# Altium PCB AVR精简学习板.PcbDoc (part 6 of 10)
Units mm, origin at the board's own origin, x right, y up, seen from the top; angles counter-clockwise.
Board outline 152.4 x 101.6 mm, 2 copper layers (Top Layer, Bottom Layer); 44 components, 51 nets, 211 pads, 6 vias.
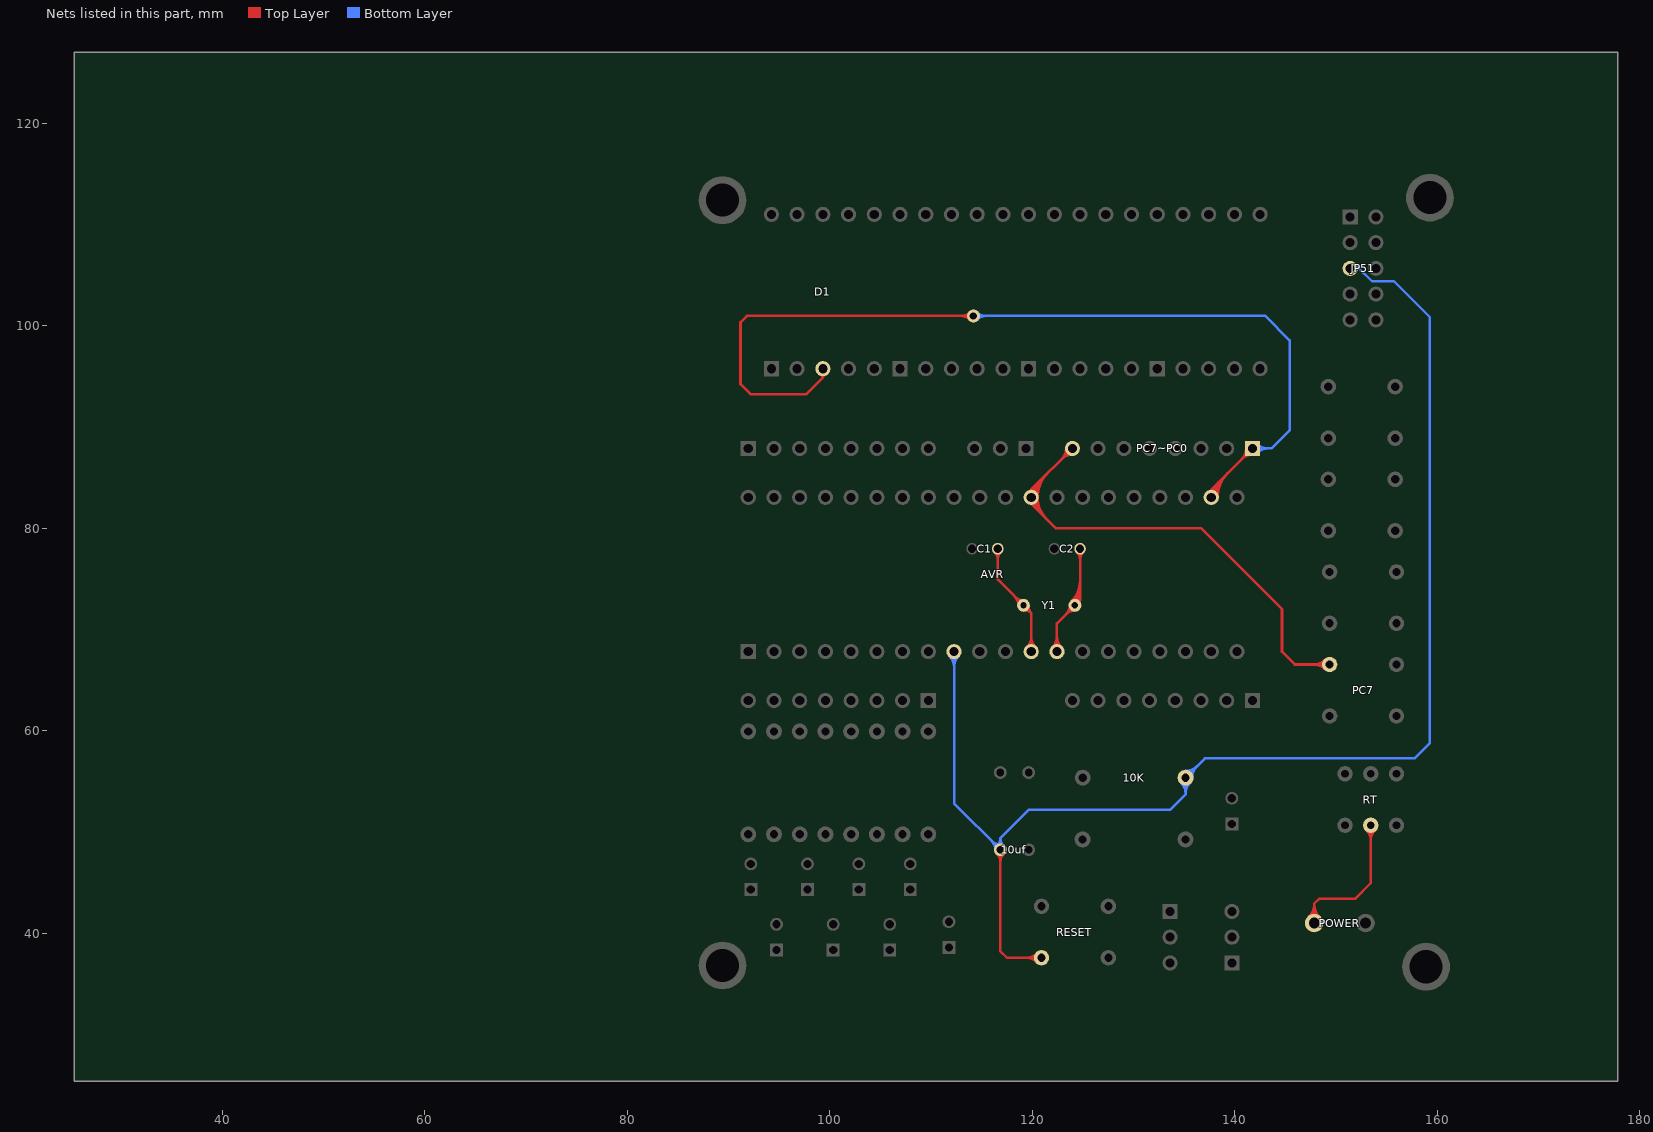
[diagram p6: the nets of this part, all layers, seen from the top]

## Via types
v1: diameter 1.27, hole 0.711, Top Layer to Bottom Layer, 6 vias

## Nets (pads, with @x,y where several pads share a name; then routed paths per layer and width w, separated by ;. In a path a pad name is that pad's centre, name@x,y a point inside that pad or via, vN(x,y) a via of type N, cw(c..) or ccw(c..) an arc to the next point about the centre after c; other vN are vias at no path point) (continued)
Net4_0: AVR.29 PC7.0 PC7~PC0.8 | length 201.8
  Top Layer w0.254: PC7~PC0.8@123.952,87.884 119.888,83.82 ; PC7.0@149.352,66.548 145.923,66.548 144.653,67.818 144.653,72.009 136.652,80.01 122.301,80.01 119.888,82.423 119.888,83.82 ; AVR.29@119.749,83.058 ccw(c120.946,83.058) 120.1,82.211 ; AVR.29@119.749,83.058 cw(c121.253,83.058) 120.19,84.122 ; AVR.29@119.749,83.058 ccw(c120.946,83.058) 120.1,82.211 ; AVR.29@119.749,83.058 cw(c121.253,83.058) 120.19,84.122 ; AVR.29@119.749,83.058 cw(c121.253,83.058) 120.19,84.122 ; AVR.29@119.749,83.058 ccw(c120.946,83.058) 120.1,82.211 ; AVR.29@119.749,83.058 cw(c121.253,83.058) 120.19,84.122 ; AVR.29@119.749,83.058 ccw(c120.946,83.058) 120.1,82.211 ; AVR.29@119.749,83.058 cw(c121.253,83.058) 120.19,84.122 ; AVR.29@119.749,83.058 ccw(c120.946,83.058) 120.1,82.211 ; AVR.29@119.749,83.058 cw(c121.253,83.058) 120.19,84.122 ; AVR.29@119.749,83.058 ccw(c120.946,83.058) 120.1,82.211 ; AVR.29@119.749,83.058 cw(c121.253,83.058) 120.19,84.122 ; AVR.29@119.749,83.058 ccw(c120.946,83.058) 120.1,82.211 ; AVR.29@119.764,83.669 ccw(c119.734,83.82) 119.888,83.82 ; AVR.29@119.764,83.669 ccw(c119.734,83.82) 119.888,83.82 ; AVR.29@119.764,83.669 ccw(c119.734,83.82) 119.888,83.82 ; AVR.29@119.764,83.669 ccw(c119.734,83.82) 119.888,83.82 ; AVR.29@119.764,83.669 ccw(c119.734,83.82) 119.888,83.82 ; AVR.29@119.764,83.669 ccw(c119.734,83.82) 119.888,83.82 ; AVR.29@119.764,83.669 ccw(c119.734,83.82) 119.888,83.82 ; 119.888,83.82 ccw(c120.042,83.82) AVR.29@120.012,83.669 ; 119.888,83.82 ccw(c120.042,83.82) AVR.29@120.012,83.669 ; 119.888,83.82 ccw(c120.042,83.82) AVR.29@120.012,83.669 ; 119.888,83.82 ccw(c120.042,83.82) AVR.29@120.012,83.669 ; 119.888,83.82 ccw(c120.042,83.82) AVR.29@120.012,83.669 ; 119.888,83.82 ccw(c120.042,83.82) AVR.29@120.012,83.669 ; 119.888,83.82 ccw(c120.042,83.82) AVR.29@120.012,83.669 ; AVR.29@120.003,83.058 ccw(c121.814,83.058) 120.533,81.778 ; AVR.29@120.003,83.058 cw(c122.12,83.058) 120.623,84.555 ; AVR.29@120.003,83.058 ccw(c121.814,83.058) 120.533,81.778 ; AVR.29@120.003,83.058 cw(c122.12,83.058) 120.623,84.555 ; AVR.29@120.003,83.058 cw(c122.12,83.058) 120.623,84.555 ; AVR.29@120.003,83.058 ccw(c121.814,83.058) 120.533,81.778 ; AVR.29@120.003,83.058 cw(c122.12,83.058) 120.623,84.555 ; AVR.29@120.003,83.058 ccw(c121.814,83.058) 120.533,81.778 ; AVR.29@120.003,83.058 cw(c122.12,83.058) 120.623,84.555 ; AVR.29@120.003,83.058 ccw(c121.814,83.058) 120.533,81.778 ; AVR.29@120.003,83.058 cw(c122.12,83.058) 120.623,84.555 ; AVR.29@120.003,83.058 ccw(c121.814,83.058) 120.533,81.778 ; AVR.29@120.003,83.058 cw(c122.12,83.058) 120.623,84.555 ; AVR.29@120.003,83.058 ccw(c121.814,83.058) 120.533,81.778 ; AVR.29@120.257,83.058 ccw(c122.681,83.058) 120.967,81.344 ; AVR.29@120.257,83.058 cw(c122.987,83.058) 121.057,84.989 ; AVR.29@120.257,83.058 ccw(c122.681,83.058) 120.967,81.344 ; AVR.29@120.257,83.058 cw(c122.987,83.058) 121.057,84.989 ; AVR.29@120.257,83.058 cw(c122.987,83.058) 121.057,84.989 ; AVR.29@120.257,83.058 ccw(c122.681,83.058) 120.967,81.344 ; AVR.29@120.257,83.058 cw(c122.987,83.058) 121.057,84.989 ; AVR.29@120.257,83.058 ccw(c122.681,83.058) 120.967,81.344 ; AVR.29@120.257,83.058 cw(c122.987,83.058) 121.057,84.989 ; AVR.29@120.257,83.058 ccw(c122.681,83.058) 120.967,81.344 ; AVR.29@120.257,83.058 cw(c122.987,83.058) 121.057,84.989 ; AVR.29@120.257,83.058 ccw(c122.681,83.058) 120.967,81.344 ; AVR.29@120.257,83.058 cw(c122.987,83.058) 121.057,84.989 ; AVR.29@120.257,83.058 ccw(c122.681,83.058) 120.967,81.344 ; AVR.29@120.511,83.058 ccw(c123.548,83.058) 121.401,80.91 ; AVR.29@120.511,83.058 cw(c123.855,83.058) 121.49,85.422 ; AVR.29@120.511,83.058 ccw(c123.548,83.058) 121.401,80.91 ; AVR.29@120.511,83.058 cw(c123.855,83.058) 121.49,85.422 ; AVR.29@120.511,83.058 cw(c123.855,83.058) 121.49,85.422 ; AVR.29@120.511,83.058 ccw(c123.548,83.058) 121.401,80.91 ; AVR.29@120.511,83.058 cw(c123.855,83.058) 121.49,85.422 ; AVR.29@120.511,83.058 ccw(c123.548,83.058) 121.401,80.91 ; AVR.29@120.511,83.058 cw(c123.855,83.058) 121.49,85.422 ; AVR.29@120.511,83.058 ccw(c123.548,83.058) 121.401,80.91 ; AVR.29@120.511,83.058 cw(c123.855,83.058) 121.49,85.422 ; AVR.29@120.511,83.058 ccw(c123.548,83.058) 121.401,80.91 ; AVR.29@120.511,83.058 cw(c123.855,83.058) 121.49,85.422 ; AVR.29@120.511,83.058 ccw(c123.548,83.058) 121.401,80.91 ; 122.888,86.82 cw(c123.952,85.757) PC7~PC0.8@123.952,87.261 ; 122.888,86.82 ccw(c121.825,87.884) PC7~PC0.8@123.329,87.884 ; 122.888,86.82 cw(c123.952,85.757) PC7~PC0.8@123.952,87.261 ; 122.888,86.82 ccw(c121.825,87.884) PC7~PC0.8@123.329,87.884 ; 122.888,86.82 ccw(c121.825,87.884) PC7~PC0.8@123.329,87.884 ; 122.888,86.82 cw(c123.952,85.757) PC7~PC0.8@123.952,87.261 ; 122.888,86.82 ccw(c121.825,87.884) PC7~PC0.8@123.329,87.884 ; 122.888,86.82 cw(c123.952,85.757) PC7~PC0.8@123.952,87.261 ; 122.888,86.82 ccw(c121.825,87.884) PC7~PC0.8@123.329,87.884 ; 122.888,86.82 cw(c123.952,85.757) PC7~PC0.8@123.952,87.261 ; 122.888,86.82 ccw(c121.825,87.884) PC7~PC0.8@123.329,87.884 ; 122.888,86.82 cw(c123.952,85.757) PC7~PC0.8@123.952,87.261 ; 122.888,86.82 ccw(c121.825,87.884) PC7~PC0.8@123.329,87.884 ; 122.888,86.82 cw(c123.952,85.757) PC7~PC0.8@123.952,87.261 ; 123.322,87.254 cw(c123.952,86.624) PC7~PC0.8@123.952,87.515 ; 123.322,87.254 ccw(c122.692,87.884) PC7~PC0.8@123.583,87.884 ; 123.322,87.254 cw(c123.952,86.624) PC7~PC0.8@123.952,87.515 ; 123.322,87.254 ccw(c122.692,87.884) PC7~PC0.8@123.583,87.884 ; 123.322,87.254 ccw(c122.692,87.884) PC7~PC0.8@123.583,87.884 ; 123.322,87.254 cw(c123.952,86.624) PC7~PC0.8@123.952,87.515 ; 123.322,87.254 ccw(c122.692,87.884) PC7~PC0.8@123.583,87.884 ; 123.322,87.254 cw(c123.952,86.624) PC7~PC0.8@123.952,87.515 ; 123.322,87.254 ccw(c122.692,87.884) PC7~PC0.8@123.583,87.884 ; 123.322,87.254 cw(c123.952,86.624) PC7~PC0.8@123.952,87.515 ; 123.322,87.254 ccw(c122.692,87.884) PC7~PC0.8@123.583,87.884 ; 123.322,87.254 cw(c123.952,86.624) PC7~PC0.8@123.952,87.515 ; 123.322,87.254 ccw(c122.692,87.884) PC7~PC0.8@123.583,87.884 ; 123.322,87.254 cw(c123.952,86.624) PC7~PC0.8@123.952,87.515 ; 147.819,66.548 cw(c147.819,65.015) PC7.0@148.903,66.099 ; 147.819,66.548 ccw(c147.819,68.081) PC7.0@148.903,66.997 ; 147.819,66.548 cw(c147.819,65.015) PC7.0@148.903,66.099 ; 147.819,66.548 ccw(c147.819,68.081) PC7.0@148.903,66.997 ; 147.819,66.548 ccw(c147.819,68.081) PC7.0@148.903,66.997 ; 147.819,66.548 cw(c147.819,65.015) PC7.0@148.903,66.099 ; 147.819,66.548 ccw(c147.819,68.081) PC7.0@148.903,66.997 ; 147.819,66.548 cw(c147.819,65.015) PC7.0@148.903,66.099 ; 147.819,66.548 ccw(c147.819,68.081) PC7.0@148.903,66.997 ; 147.819,66.548 cw(c147.819,65.015) PC7.0@148.903,66.099 ; 147.819,66.548 ccw(c147.819,68.081) PC7.0@148.903,66.997 ; 147.819,66.548 cw(c147.819,65.015) PC7.0@148.903,66.099 ; 147.819,66.548 ccw(c147.819,68.081) PC7.0@148.903,66.997 ; 147.819,66.548 cw(c147.819,65.015) PC7.0@148.903,66.099 ; 148.432,66.548 cw(c148.432,65.628) PC7.0@149.083,66.279 ; 148.432,66.548 ccw(c148.432,67.468) PC7.0@149.083,66.817 ; 148.432,66.548 cw(c148.432,65.628) PC7.0@149.083,66.279 ; 148.432,66.548 ccw(c148.432,67.468) PC7.0@149.083,66.817 ; 148.432,66.548 ccw(c148.432,67.468) PC7.0@149.083,66.817 ; 148.432,66.548 cw(c148.432,65.628) PC7.0@149.083,66.279 ; 148.432,66.548 ccw(c148.432,67.468) PC7.0@149.083,66.817 ; 148.432,66.548 cw(c148.432,65.628) PC7.0@149.083,66.279 ; 148.432,66.548 ccw(c148.432,67.468) PC7.0@149.083,66.817 ; 148.432,66.548 cw(c148.432,65.628) PC7.0@149.083,66.279 ; 148.432,66.548 ccw(c148.432,67.468) PC7.0@149.083,66.817 ; 148.432,66.548 cw(c148.432,65.628) PC7.0@149.083,66.279 ; 148.432,66.548 ccw(c148.432,67.468) PC7.0@149.083,66.817 ; 148.432,66.548 cw(c148.432,65.628) PC7.0@149.083,66.279
Net5_2: 10K.1 10uf.1@116.84,48.26 AVR.9 JP51.5 RESET.2 | length 290.7
  Top Layer w0.254: 10uf.1@116.84,48.26 116.84,38.227 117.475,37.592 RESET.2@120.904,37.592 ; 10uf.1@116.481,47.901 cw(c115.614,47.034) 116.84,47.034 ; 10uf.1@116.481,47.901 cw(c115.614,47.034) 116.84,47.034 ; 10uf.1@116.481,47.901 cw(c115.614,47.034) 116.84,47.034 ; 10uf.1@116.481,47.901 cw(c115.614,47.034) 116.84,47.034 ; 10uf.1@116.481,47.901 cw(c115.614,47.034) 116.84,47.034 ; 10uf.1@116.481,47.901 cw(c115.614,47.034) 116.84,47.034 ; 10uf.1@116.481,47.901 cw(c115.614,47.034) 116.84,47.034 ; 116.84,47.034 cw(c118.066,47.034) 10uf.1@117.199,47.901 ; 116.84,47.034 cw(c118.066,47.034) 10uf.1@117.199,47.901 ; 116.84,47.034 cw(c118.066,47.034) 10uf.1@117.199,47.901 ; 116.84,47.034 cw(c118.066,47.034) 10uf.1@117.199,47.901 ; 116.84,47.034 cw(c118.066,47.034) 10uf.1@117.199,47.901 ; 116.84,47.034 cw(c118.066,47.034) 10uf.1@117.199,47.901 ; 116.84,47.034 cw(c118.066,47.034) 10uf.1@117.199,47.901 ; 119.371,37.592 cw(c119.371,36.059) RESET.2@120.455,37.143 ; 119.371,37.592 ccw(c119.371,39.125) RESET.2@120.455,38.041 ; 119.371,37.592 cw(c119.371,36.059) RESET.2@120.455,37.143 ; 119.371,37.592 ccw(c119.371,39.125) RESET.2@120.455,38.041 ; 119.371,37.592 ccw(c119.371,39.125) RESET.2@120.455,38.041 ; 119.371,37.592 cw(c119.371,36.059) RESET.2@120.455,37.143 ; 119.371,37.592 ccw(c119.371,39.125) RESET.2@120.455,38.041 ; 119.371,37.592 cw(c119.371,36.059) RESET.2@120.455,37.143 ; 119.371,37.592 ccw(c119.371,39.125) RESET.2@120.455,38.041 ; 119.371,37.592 cw(c119.371,36.059) RESET.2@120.455,37.143 ; 119.371,37.592 ccw(c119.371,39.125) RESET.2@120.455,38.041 ; 119.371,37.592 cw(c119.371,36.059) RESET.2@120.455,37.143 ; 119.371,37.592 ccw(c119.371,39.125) RESET.2@120.455,38.041 ; 119.371,37.592 cw(c119.371,36.059) RESET.2@120.455,37.143 ; 119.984,37.592 cw(c119.984,36.672) RESET.2@120.635,37.323 ; 119.984,37.592 ccw(c119.984,38.512) RESET.2@120.635,37.861 ; 119.984,37.592 cw(c119.984,36.672) RESET.2@120.635,37.323 ; 119.984,37.592 ccw(c119.984,38.512) RESET.2@120.635,37.861 ; 119.984,37.592 ccw(c119.984,38.512) RESET.2@120.635,37.861 ; 119.984,37.592 cw(c119.984,36.672) RESET.2@120.635,37.323 ; 119.984,37.592 ccw(c119.984,38.512) RESET.2@120.635,37.861 ; 119.984,37.592 cw(c119.984,36.672) RESET.2@120.635,37.323 ; 119.984,37.592 ccw(c119.984,38.512) RESET.2@120.635,37.861 ; 119.984,37.592 cw(c119.984,36.672) RESET.2@120.635,37.323 ; 119.984,37.592 ccw(c119.984,38.512) RESET.2@120.635,37.861 ; 119.984,37.592 cw(c119.984,36.672) RESET.2@120.635,37.323 ; 119.984,37.592 ccw(c119.984,38.512) RESET.2@120.635,37.861 ; 119.984,37.592 cw(c119.984,36.672) RESET.2@120.635,37.323
  Bottom Layer w0.254: AVR.9@112.268,67.818 112.268,52.832 10uf.1@116.84,48.26 116.84,49.403 ; JP51.5@151.384,105.664 152.273,105.664 ; AVR.9@111.827,67.377 cw(c110.764,66.314) 112.268,66.314 ; AVR.9@111.827,67.377 cw(c110.764,66.314) 112.268,66.314 ; AVR.9@111.827,67.377 cw(c110.764,66.314) 112.268,66.314 ; AVR.9@111.827,67.377 cw(c110.764,66.314) 112.268,66.314 ; AVR.9@111.827,67.377 cw(c110.764,66.314) 112.268,66.314 ; AVR.9@111.827,67.377 cw(c110.764,66.314) 112.268,66.314 ; AVR.9@111.827,67.377 cw(c110.764,66.314) 112.268,66.314 ; AVR.9@112.007,67.557 cw(c111.377,66.927) 112.268,66.927 ; AVR.9@112.007,67.557 cw(c111.377,66.927) 112.268,66.927 ; AVR.9@112.007,67.557 cw(c111.377,66.927) 112.268,66.927 ; AVR.9@112.007,67.557 cw(c111.377,66.927) 112.268,66.927 ; AVR.9@112.007,67.557 cw(c111.377,66.927) 112.268,66.927 ; AVR.9@112.007,67.557 cw(c111.377,66.927) 112.268,66.927 ; AVR.9@112.007,67.557 cw(c111.377,66.927) 112.268,66.927 ; 112.268,66.314 cw(c113.772,66.314) AVR.9@112.709,67.377 ; 112.268,66.314 cw(c113.772,66.314) AVR.9@112.709,67.377 ; 112.268,66.314 cw(c113.772,66.314) AVR.9@112.709,67.377 ; 112.268,66.314 cw(c113.772,66.314) AVR.9@112.709,67.377 ; 112.268,66.314 cw(c113.772,66.314) AVR.9@112.709,67.377 ; 112.268,66.314 cw(c113.772,66.314) AVR.9@112.709,67.377 ; 112.268,66.314 cw(c113.772,66.314) AVR.9@112.709,67.377 ; 112.268,66.927 cw(c113.159,66.927) AVR.9@112.529,67.557 ; 112.268,66.927 cw(c113.159,66.927) AVR.9@112.529,67.557 ; 112.268,66.927 cw(c113.159,66.927) AVR.9@112.529,67.557 ; 112.268,66.927 cw(c113.159,66.927) AVR.9@112.529,67.557 ; 112.268,66.927 cw(c113.159,66.927) AVR.9@112.529,67.557 ; 112.268,66.927 cw(c113.159,66.927) AVR.9@112.529,67.557 ; 112.268,66.927 cw(c113.159,66.927) AVR.9@112.529,67.557 ; 115.973,49.127 cw(c115.106,48.26) 10uf.1@116.332,48.26 ; 115.973,49.127 ccw(c116.84,49.994) 10uf.1@116.84,48.768 ; 115.973,49.127 cw(c115.106,48.26) 10uf.1@116.332,48.26 ; 115.973,49.127 ccw(c116.84,49.994) 10uf.1@116.84,48.768 ; 115.973,49.127 ccw(c116.84,49.994) 10uf.1@116.84,48.768 ; 115.973,49.127 cw(c115.106,48.26) 10uf.1@116.332,48.26 ; 115.973,49.127 ccw(c116.84,49.994) 10uf.1@116.84,48.768 ; 115.973,49.127 cw(c115.106,48.26) 10uf.1@116.332,48.26 ; 115.973,49.127 ccw(c116.84,49.994) 10uf.1@116.84,48.768 ; 115.973,49.127 cw(c115.106,48.26) 10uf.1@116.332,48.26 ; 115.973,49.127 ccw(c116.84,49.994) 10uf.1@116.84,48.768 ; 115.973,49.127 cw(c115.106,48.26) 10uf.1@116.332,48.26 ; 115.973,49.127 ccw(c116.84,49.994) 10uf.1@116.84,48.768 ; 115.973,49.127 cw(c115.106,48.26) 10uf.1@116.332,48.26 ; 10uf.1@116.5,48.637 ccw(c115.808,49.403) 116.84,49.403 ; 10uf.1@116.5,48.637 ccw(c115.808,49.403) 116.84,49.403 ; 10uf.1@116.5,48.637 ccw(c115.808,49.403) 116.84,49.403 ; 10uf.1@116.5,48.637 ccw(c115.808,49.403) 116.84,49.403 ; 10uf.1@116.5,48.637 ccw(c115.808,49.403) 116.84,49.403 ; 10uf.1@116.5,48.637 ccw(c115.808,49.403) 116.84,49.403 ; 10uf.1@116.5,48.637 ccw(c115.808,49.403) 116.84,49.403 ; 116.84,49.403 ccw(c117.872,49.403) 10uf.1@117.18,48.637 ; 116.84,49.403 ccw(c117.872,49.403) 10uf.1@117.18,48.637 ; 116.84,49.403 ccw(c117.872,49.403) 10uf.1@117.18,48.637 ; 116.84,49.403 ccw(c117.872,49.403) 10uf.1@117.18,48.637 ; 116.84,49.403 ccw(c117.872,49.403) 10uf.1@117.18,48.637 ; 116.84,49.403 ccw(c117.872,49.403) 10uf.1@117.18,48.637 ; 116.84,49.403 ccw(c117.872,49.403) 10uf.1@117.18,48.637 ; 116.84,49.403 119.634,52.197 133.604,52.197 135.132,53.725 10K.1@135.132,55.373 137.036,57.277 157.734,57.277 159.258,58.801 159.258,100.838 155.702,104.394 153.543,104.394 152.273,105.664 ; 10K.1@134.665,54.906 cw(c133.537,53.779) 135.132,53.779 ; 10K.1@134.665,54.906 cw(c133.537,53.779) 135.132,53.779 ; 10K.1@134.665,54.906 cw(c133.537,53.779) 135.132,53.779 ; 10K.1@134.665,54.906 cw(c133.537,53.779) 135.132,53.779 ; 10K.1@134.665,54.906 cw(c133.537,53.779) 135.132,53.779 ; 10K.1@134.665,54.906 cw(c133.537,53.779) 135.132,53.779 ; 10K.1@134.665,54.906 cw(c133.537,53.779) 135.132,53.779 ; 10K.1@134.844,55.086 cw(c134.151,54.392) 135.132,54.392 ; 10K.1@134.844,55.086 cw(c134.151,54.392) 135.132,54.392 ; 10K.1@134.844,55.086 cw(c134.151,54.392) 135.132,54.392 ; 10K.1@134.844,55.086 cw(c134.151,54.392) 135.132,54.392 ; 10K.1@134.844,55.086 cw(c134.151,54.392) 135.132,54.392 ; 10K.1@134.844,55.086 cw(c134.151,54.392) 135.132,54.392 ; 10K.1@134.844,55.086 cw(c134.151,54.392) 135.132,54.392 ; 135.132,53.779 cw(c136.726,53.779) 10K.1@135.599,54.906 ; 135.132,53.779 cw(c136.726,53.779) 10K.1@135.599,54.906 ; 135.132,53.779 cw(c136.726,53.779) 10K.1@135.599,54.906 ; 135.132,53.779 cw(c136.726,53.779) 10K.1@135.599,54.906 ; 135.132,53.779 cw(c136.726,53.779) 10K.1@135.599,54.906 ; 135.132,53.779 cw(c136.726,53.779) 10K.1@135.599,54.906 ; 135.132,53.779 cw(c136.726,53.779) 10K.1@135.599,54.906 ; 135.132,54.392 cw(c136.113,54.392) 10K.1@135.419,55.086 ; 135.132,54.392 cw(c136.113,54.392) 10K.1@135.419,55.086 ; 135.132,54.392 cw(c136.113,54.392) 10K.1@135.419,55.086 ; 135.132,54.392 cw(c136.113,54.392) 10K.1@135.419,55.086 ; 135.132,54.392 cw(c136.113,54.392) 10K.1@135.419,55.086 ; 135.132,54.392 cw(c136.113,54.392) 10K.1@135.419,55.086 ; 135.132,54.392 cw(c136.113,54.392) 10K.1@135.419,55.086 ; 10K.1@135.132,55.779 ccw(c135.132,56.761) 135.826,56.067 ; 10K.1@135.132,55.779 ccw(c135.132,56.761) 135.826,56.067 ; 10K.1@135.132,55.779 ccw(c135.132,56.761) 135.826,56.067 ; 10K.1@135.132,55.779 ccw(c135.132,56.761) 135.826,56.067 ; 10K.1@135.132,55.779 ccw(c135.132,56.761) 135.826,56.067 ; 10K.1@135.132,55.779 ccw(c135.132,56.761) 135.826,56.067 ; 10K.1@135.132,55.779 ccw(c135.132,56.761) 135.826,56.067 ; 10K.1@135.132,56.033 ccw(c135.132,57.628) 136.259,56.5 ; 10K.1@135.132,56.033 ccw(c135.132,57.628) 136.259,56.5 ; 10K.1@135.132,56.033 ccw(c135.132,57.628) 136.259,56.5 ; 10K.1@135.132,56.033 ccw(c135.132,57.628) 136.259,56.5 ; 10K.1@135.132,56.033 ccw(c135.132,57.628) 136.259,56.5 ; 10K.1@135.132,56.033 ccw(c135.132,57.628) 136.259,56.5 ; 10K.1@135.132,56.033 ccw(c135.132,57.628) 136.259,56.5 ; 10K.1@135.538,55.373 cw(c136.519,55.373) 135.826,56.067 ; 10K.1@135.538,55.373 cw(c136.519,55.373) 135.826,56.067 ; 10K.1@135.538,55.373 cw(c136.519,55.373) 135.826,56.067 ; 10K.1@135.538,55.373 cw(c136.519,55.373) 135.826,56.067 ; 10K.1@135.538,55.373 cw(c136.519,55.373) 135.826,56.067 ; 10K.1@135.538,55.373 cw(c136.519,55.373) 135.826,56.067 ; 10K.1@135.538,55.373 cw(c136.519,55.373) 135.826,56.067 ; 10K.1@135.792,55.373 cw(c137.387,55.373) 136.259,56.5 ; 10K.1@135.792,55.373 cw(c137.387,55.373) 136.259,56.5 ; 10K.1@135.792,55.373 cw(c137.387,55.373) 136.259,56.5 ; 10K.1@135.792,55.373 cw(c137.387,55.373) 136.259,56.5 ; 10K.1@135.792,55.373 cw(c137.387,55.373) 136.259,56.5 ; 10K.1@135.792,55.373 cw(c137.387,55.373) 136.259,56.5 ; 10K.1@135.792,55.373 cw(c137.387,55.373) 136.259,56.5 ; JP51.5@151.97,105.451 cw(c152.273,105.341) 152.273,105.664 ; JP51.5@151.97,105.451 cw(c152.273,105.341) 152.273,105.664 ; JP51.5@151.97,105.451 cw(c152.273,105.341) 152.273,105.664 ; JP51.5@151.97,105.451 cw(c152.273,105.341) 152.273,105.664 ; JP51.5@151.97,105.451 cw(c152.273,105.341) 152.273,105.664 ; JP51.5@151.97,105.451 cw(c152.273,105.341) 152.273,105.664 ; JP51.5@151.97,105.451 cw(c152.273,105.341) 152.273,105.664 ; JP51.5@151.97,105.877 ccw(c152.273,105.987) 152.273,105.664 ; JP51.5@151.97,105.877 ccw(c152.273,105.987) 152.273,105.664 ; JP51.5@151.97,105.877 ccw(c152.273,105.987) 152.273,105.664 ; JP51.5@151.97,105.877 ccw(c152.273,105.987) 152.273,105.664 ; JP51.5@151.97,105.877 ccw(c152.273,105.987) 152.273,105.664 ; JP51.5@151.97,105.877 ccw(c152.273,105.987) 152.273,105.664 ; JP51.5@151.97,105.877 ccw(c152.273,105.987) 152.273,105.664
Net11_1: POWER.1 RT.1 | length 22.9
  Top Layer w0.254: POWER.1@147.273,41.576 ccw(c145.933,42.916) 147.828,42.916 ccw(c149.723,42.916) POWER.1@148.383,41.576 ; POWER.1@147.453,41.396 ccw(c146.546,42.303) 147.828,42.303 ccw(c149.11,42.303) POWER.1@148.203,41.396 ; POWER.1@147.828,41.021 147.828,42.926 148.336,43.434 151.892,43.434 153.416,44.958 RT.1@153.416,50.673 ; RT.1@152.967,50.224 cw(c151.883,49.14) 153.416,49.14 cw(c154.949,49.14) RT.1@153.865,50.224 ; RT.1@153.147,50.404 cw(c152.496,49.753) 153.416,49.753 cw(c154.336,49.753) RT.1@153.685,50.404
NetC1_1: AVR.12 C1.1 Y1.2 | length 74.1
  Top Layer w0.254: C1.1@116.586,77.978 116.586,74.93 119.888,71.628 ; AVR.12@119.888,67.818 119.888,71.628 ; C1.1@116.272,77.664 cw(c115.513,76.905) 116.586,76.905 ; C1.1@116.272,77.664 cw(c115.513,76.905) 116.586,76.905 ; C1.1@116.272,77.664 cw(c115.513,76.905) 116.586,76.905 ; C1.1@116.272,77.664 cw(c115.513,76.905) 116.586,76.905 ; C1.1@116.272,77.664 cw(c115.513,76.905) 116.586,76.905 ; C1.1@116.272,77.664 cw(c115.513,76.905) 116.586,76.905 ; C1.1@116.272,77.664 cw(c115.513,76.905) 116.586,76.905 ; 116.586,76.905 cw(c117.659,76.905) C1.1@116.9,77.664 ; 116.586,76.905 cw(c117.659,76.905) C1.1@116.9,77.664 ; 116.586,76.905 cw(c117.659,76.905) C1.1@116.9,77.664 ; 116.586,76.905 cw(c117.659,76.905) C1.1@116.9,77.664 ; 116.586,76.905 cw(c117.659,76.905) C1.1@116.9,77.664 ; 116.586,76.905 cw(c117.659,76.905) C1.1@116.9,77.664 ; 116.586,76.905 cw(c117.659,76.905) C1.1@116.9,77.664 ; 118.259,73.257 cw(c117.392,72.39) Y1.2@118.618,72.39 ; 118.259,73.257 ccw(c119.126,74.124) Y1.2@119.126,72.898 ; 118.259,73.257 cw(c117.392,72.39) Y1.2@118.618,72.39 ; 118.259,73.257 ccw(c119.126,74.124) Y1.2@119.126,72.898 ; 118.259,73.257 ccw(c119.126,74.124) Y1.2@119.126,72.898 ; 118.259,73.257 cw(c117.392,72.39) Y1.2@118.618,72.39 ; 118.259,73.257 ccw(c119.126,74.124) Y1.2@119.126,72.898 ; 118.259,73.257 cw(c117.392,72.39) Y1.2@118.618,72.39 ; 118.259,73.257 ccw(c119.126,74.124) Y1.2@119.126,72.898 ; 118.259,73.257 cw(c117.392,72.39) Y1.2@118.618,72.39 ; 118.259,73.257 ccw(c119.126,74.124) Y1.2@119.126,72.898 ; 118.259,73.257 cw(c117.392,72.39) Y1.2@118.618,72.39 ; 118.259,73.257 ccw(c119.126,74.124) Y1.2@119.126,72.898 ; 118.259,73.257 cw(c117.392,72.39) Y1.2@118.618,72.39 ; Y1.2@119.175,71.884 cw(c119.259,70.999) 119.888,71.628 ; Y1.2@119.175,71.884 cw(c119.259,70.999) 119.888,71.628 ; Y1.2@119.175,71.884 cw(c119.259,70.999) 119.888,71.628 ; Y1.2@119.175,71.884 cw(c119.259,70.999) 119.888,71.628 ; Y1.2@119.175,71.884 cw(c119.259,70.999) 119.888,71.628 ; Y1.2@119.175,71.884 cw(c119.259,70.999) 119.888,71.628 ; Y1.2@119.175,71.884 cw(c119.259,70.999) 119.888,71.628 ; AVR.12@119.447,68.259 ccw(c118.384,69.322) 119.888,69.322 ; AVR.12@119.447,68.259 ccw(c118.384,69.322) 119.888,69.322 ; AVR.12@119.447,68.259 ccw(c118.384,69.322) 119.888,69.322 ; AVR.12@119.447,68.259 ccw(c118.384,69.322) 119.888,69.322 ; AVR.12@119.447,68.259 ccw(c118.384,69.322) 119.888,69.322 ; AVR.12@119.447,68.259 ccw(c118.384,69.322) 119.888,69.322 ; AVR.12@119.447,68.259 ccw(c118.384,69.322) 119.888,69.322 ; AVR.12@119.627,68.079 ccw(c118.997,68.709) 119.888,68.709 ; AVR.12@119.627,68.079 ccw(c118.997,68.709) 119.888,68.709 ; AVR.12@119.627,68.079 ccw(c118.997,68.709) 119.888,68.709 ; AVR.12@119.627,68.079 ccw(c118.997,68.709) 119.888,68.709 ; AVR.12@119.627,68.079 ccw(c118.997,68.709) 119.888,68.709 ; AVR.12@119.627,68.079 ccw(c118.997,68.709) 119.888,68.709 ; AVR.12@119.627,68.079 ccw(c118.997,68.709) 119.888,68.709 ; Y1.2@119.632,72.341 ccw(c120.517,72.257) 119.888,71.628 ; Y1.2@119.632,72.341 ccw(c120.517,72.257) 119.888,71.628 ; Y1.2@119.632,72.341 ccw(c120.517,72.257) 119.888,71.628 ; Y1.2@119.632,72.341 ccw(c120.517,72.257) 119.888,71.628 ; Y1.2@119.632,72.341 ccw(c120.517,72.257) 119.888,71.628 ; Y1.2@119.632,72.341 ccw(c120.517,72.257) 119.888,71.628 ; Y1.2@119.632,72.341 ccw(c120.517,72.257) 119.888,71.628 ; 119.888,68.709 ccw(c120.779,68.709) AVR.12@120.149,68.079 ; 119.888,68.709 ccw(c120.779,68.709) AVR.12@120.149,68.079 ; 119.888,68.709 ccw(c120.779,68.709) AVR.12@120.149,68.079 ; 119.888,68.709 ccw(c120.779,68.709) AVR.12@120.149,68.079 ; 119.888,68.709 ccw(c120.779,68.709) AVR.12@120.149,68.079 ; 119.888,68.709 ccw(c120.779,68.709) AVR.12@120.149,68.079 ; 119.888,68.709 ccw(c120.779,68.709) AVR.12@120.149,68.079 ; 119.888,69.322 ccw(c121.392,69.322) AVR.12@120.329,68.259 ; 119.888,69.322 ccw(c121.392,69.322) AVR.12@120.329,68.259 ; 119.888,69.322 ccw(c121.392,69.322) AVR.12@120.329,68.259 ; 119.888,69.322 ccw(c121.392,69.322) AVR.12@120.329,68.259 ; 119.888,69.322 ccw(c121.392,69.322) AVR.12@120.329,68.259 ; 119.888,69.322 ccw(c121.392,69.322) AVR.12@120.329,68.259 ; 119.888,69.322 ccw(c121.392,69.322) AVR.12@120.329,68.259
NetC2_2: AVR.13 C2.2 Y1.1 | length 112
  Top Layer w0.254: AVR.13@122.428,67.818 122.428,70.612 124.714,72.898 ; C2.2@124.714,77.978 124.714,72.898 ; AVR.13@121.987,68.259 ccw(c120.924,69.322) 122.428,69.322 ; AVR.13@121.987,68.259 ccw(c120.924,69.322) 122.428,69.322 ; AVR.13@121.987,68.259 ccw(c120.924,69.322) 122.428,69.322 ; AVR.13@121.987,68.259 ccw(c120.924,69.322) 122.428,69.322 ; AVR.13@121.987,68.259 ccw(c120.924,69.322) 122.428,69.322 ; AVR.13@121.987,68.259 ccw(c120.924,69.322) 122.428,69.322 ; AVR.13@121.987,68.259 ccw(c120.924,69.322) 122.428,69.322 ; AVR.13@122.167,68.079 ccw(c121.537,68.709) 122.428,68.709 ; AVR.13@122.167,68.079 ccw(c121.537,68.709) 122.428,68.709 ; AVR.13@122.167,68.079 ccw(c121.537,68.709) 122.428,68.709 ; AVR.13@122.167,68.079 ccw(c121.537,68.709) 122.428,68.709 ; AVR.13@122.167,68.079 ccw(c121.537,68.709) 122.428,68.709 ; AVR.13@122.167,68.079 ccw(c121.537,68.709) 122.428,68.709 ; AVR.13@122.167,68.079 ccw(c121.537,68.709) 122.428,68.709 ; 122.428,68.709 ccw(c123.319,68.709) AVR.13@122.689,68.079 ; 122.428,68.709 ccw(c123.319,68.709) AVR.13@122.689,68.079 ; 122.428,68.709 ccw(c123.319,68.709) AVR.13@122.689,68.079 ; 122.428,68.709 ccw(c123.319,68.709) AVR.13@122.689,68.079 ; 122.428,68.709 ccw(c123.319,68.709) AVR.13@122.689,68.079 ; 122.428,68.709 ccw(c123.319,68.709) AVR.13@122.689,68.079 ; 122.428,68.709 ccw(c123.319,68.709) AVR.13@122.689,68.079 ; 122.428,69.322 ccw(c123.932,69.322) AVR.13@122.869,68.259 ; 122.428,69.322 ccw(c123.932,69.322) AVR.13@122.869,68.259 ; 122.428,69.322 ccw(c123.932,69.322) AVR.13@122.869,68.259 ; 122.428,69.322 ccw(c123.932,69.322) AVR.13@122.869,68.259 ; 122.428,69.322 ccw(c123.932,69.322) AVR.13@122.869,68.259 ; 122.428,69.322 ccw(c123.932,69.322) AVR.13@122.869,68.259 ; 122.428,69.322 ccw(c123.932,69.322) AVR.13@122.869,68.259 ; 123.339,71.523 cw(c124.206,70.656) Y1.1@124.206,71.882 ; 123.339,71.523 ccw(c122.472,72.39) Y1.1@123.698,72.39 ; 123.339,71.523 cw(c124.206,70.656) Y1.1@124.206,71.882 ; 123.339,71.523 ccw(c122.472,72.39) Y1.1@123.698,72.39 ; 123.339,71.523 ccw(c122.472,72.39) Y1.1@123.698,72.39 ; 123.339,71.523 cw(c124.206,70.656) Y1.1@124.206,71.882 ; 123.339,71.523 ccw(c122.472,72.39) Y1.1@123.698,72.39 ; 123.339,71.523 cw(c124.206,70.656) Y1.1@124.206,71.882 ; 123.339,71.523 ccw(c122.472,72.39) Y1.1@123.698,72.39 ; 123.339,71.523 cw(c124.206,70.656) Y1.1@124.206,71.882 ; 123.339,71.523 ccw(c122.472,72.39) Y1.1@123.698,72.39 ; 123.339,71.523 cw(c124.206,70.656) Y1.1@124.206,71.882 ; 123.339,71.523 ccw(c122.472,72.39) Y1.1@123.698,72.39 ; 123.339,71.523 cw(c124.206,70.656) Y1.1@124.206,71.882 ; Y1.1@123.847,72.749 ccw(c121.753,74.843) 124.714,74.843 ; Y1.1@123.847,72.749 ccw(c121.753,74.843) 124.714,74.843 ; Y1.1@123.847,72.749 ccw(c121.753,74.843) 124.714,74.843 ; Y1.1@123.847,72.749 ccw(c121.753,74.843) 124.714,74.843 ; Y1.1@123.847,72.749 ccw(c121.753,74.843) 124.714,74.843 ; Y1.1@123.847,72.749 ccw(c121.753,74.843) 124.714,74.843 ; Y1.1@123.847,72.749 ccw(c121.753,74.843) 124.714,74.843 ; Y1.1@124.026,72.57 ccw(c122.366,74.23) 124.714,74.23 ; Y1.1@124.026,72.57 ccw(c122.366,74.23) 124.714,74.23 ; Y1.1@124.026,72.57 ccw(c122.366,74.23) 124.714,74.23 ; Y1.1@124.026,72.57 ccw(c122.366,74.23) 124.714,74.23 ; Y1.1@124.026,72.57 ccw(c122.366,74.23) 124.714,74.23 ; Y1.1@124.026,72.57 ccw(c122.366,74.23) 124.714,74.23 ; Y1.1@124.026,72.57 ccw(c122.366,74.23) 124.714,74.23 ; Y1.1@124.206,72.39 ccw(c122.98,73.616) 124.714,73.616 ; Y1.1@124.206,72.39 ccw(c122.98,73.616) 124.714,73.616 ; Y1.1@124.206,72.39 ccw(c122.98,73.616) 124.714,73.616 ; Y1.1@124.206,72.39 ccw(c122.98,73.616) 124.714,73.616 ; Y1.1@124.206,72.39 ccw(c122.98,73.616) 124.714,73.616 ; Y1.1@124.206,72.39 ccw(c122.98,73.616) 124.714,73.616 ; Y1.1@124.206,72.39 ccw(c122.98,73.616) 124.714,73.616 ; Y1.1@124.386,72.21 ccw(c123.593,73.003) 124.714,73.003 ; Y1.1@124.386,72.21 ccw(c123.593,73.003) 124.714,73.003 ; Y1.1@124.386,72.21 ccw(c123.593,73.003) 124.714,73.003 ; Y1.1@124.386,72.21 ccw(c123.593,73.003) 124.714,73.003 ; Y1.1@124.386,72.21 ccw(c123.593,73.003) 124.714,73.003 ; Y1.1@124.386,72.21 ccw(c123.593,73.003) 124.714,73.003 ; Y1.1@124.386,72.21 ccw(c123.593,73.003) 124.714,73.003 ; C2.2@124.4,77.664 cw(c123.641,76.905) 124.714,76.905 ; C2.2@124.4,77.664 cw(c123.641,76.905) 124.714,76.905 ; C2.2@124.4,77.664 cw(c123.641,76.905) 124.714,76.905 ; C2.2@124.4,77.664 cw(c123.641,76.905) 124.714,76.905 ; C2.2@124.4,77.664 cw(c123.641,76.905) 124.714,76.905 ; C2.2@124.4,77.664 cw(c123.641,76.905) 124.714,76.905 ; C2.2@124.4,77.664 cw(c123.641,76.905) 124.714,76.905 ; Y1.1@124.425,72.848 ccw(c124.534,73.078) 124.714,72.898 ; Y1.1@124.425,72.848 ccw(c124.534,73.078) 124.714,72.898 ; Y1.1@124.425,72.848 ccw(c124.534,73.078) 124.714,72.898 ; Y1.1@124.425,72.848 ccw(c124.534,73.078) 124.714,72.898 ; Y1.1@124.425,72.848 ccw(c124.534,73.078) 124.714,72.898 ; Y1.1@124.425,72.848 ccw(c124.534,73.078) 124.714,72.898 ; Y1.1@124.425,72.848 ccw(c124.534,73.078) 124.714,72.898 ; Y1.1@124.664,72.609 cw(c124.894,72.718) 124.714,72.898 ; Y1.1@124.664,72.609 cw(c124.894,72.718) 124.714,72.898 ; Y1.1@124.664,72.609 cw(c124.894,72.718) 124.714,72.898 ; Y1.1@124.664,72.609 cw(c124.894,72.718) 124.714,72.898 ; Y1.1@124.664,72.609 cw(c124.894,72.718) 124.714,72.898 ; Y1.1@124.664,72.609 cw(c124.894,72.718) 124.714,72.898 ; Y1.1@124.664,72.609 cw(c124.894,72.718) 124.714,72.898 ; 124.714,76.905 cw(c125.787,76.905) C2.2@125.028,77.664 ; 124.714,76.905 cw(c125.787,76.905) C2.2@125.028,77.664 ; 124.714,76.905 cw(c125.787,76.905) C2.2@125.028,77.664 ; 124.714,76.905 cw(c125.787,76.905) C2.2@125.028,77.664 ; 124.714,76.905 cw(c125.787,76.905) C2.2@125.028,77.664 ; 124.714,76.905 cw(c125.787,76.905) C2.2@125.028,77.664 ; 124.714,76.905 cw(c125.787,76.905) C2.2@125.028,77.664
NetD1_3: AVR.22 D1.3 PC7~PC0.1 | length 233
  Top Layer w0.254: D1.3@99.314,95.758 99.314,94.869 ; v1(114.173,100.965) 91.821,100.965 91.186,100.33 91.186,94.234 92.202,93.218 97.663,93.218 99.314,94.869 ; AVR.22@137.668,83.058 137.668,83.82 ; PC7~PC0.1@141.732,87.884 137.668,83.82 ; D1.3@99.101,95.172 cw(c98.991,94.869) 99.314,94.869 ; D1.3@99.101,95.172 cw(c98.991,94.869) 99.314,94.869 ; D1.3@99.101,95.172 cw(c98.991,94.869) 99.314,94.869 ; D1.3@99.101,95.172 cw(c98.991,94.869) 99.314,94.869 ; D1.3@99.101,95.172 cw(c98.991,94.869) 99.314,94.869 ; D1.3@99.101,95.172 cw(c98.991,94.869) 99.314,94.869 ; D1.3@99.101,95.172 cw(c98.991,94.869) 99.314,94.869 ; 99.314,94.869 cw(c99.637,94.869) D1.3@99.527,95.172 ; 99.314,94.869 cw(c99.637,94.869) D1.3@99.527,95.172 ; 99.314,94.869 cw(c99.637,94.869) D1.3@99.527,95.172 ; 99.314,94.869 cw(c99.637,94.869) D1.3@99.527,95.172 ; 99.314,94.869 cw(c99.637,94.869) D1.3@99.527,95.172 ; 99.314,94.869 cw(c99.637,94.869) D1.3@99.527,95.172 ; 99.314,94.869 cw(c99.637,94.869) D1.3@99.527,95.172 ; 112.947,100.965 cw(c112.947,99.739) v1@113.814,100.606 ; 112.947,100.965 ccw(c112.947,102.191) v1@113.814,101.324 ; 112.947,100.965 cw(c112.947,99.739) v1@113.814,100.606 ; 112.947,100.965 ccw(c112.947,102.191) v1@113.814,101.324 ; 112.947,100.965 ccw(c112.947,102.191) v1@113.814,101.324 ; 112.947,100.965 cw(c112.947,99.739) v1@113.814,100.606 ; 112.947,100.965 ccw(c112.947,102.191) v1@113.814,101.324 ; 112.947,100.965 cw(c112.947,99.739) v1@113.814,100.606 ; 112.947,100.965 ccw(c112.947,102.191) v1@113.814,101.324 ; 112.947,100.965 cw(c112.947,99.739) v1@113.814,100.606 ; 112.947,100.965 ccw(c112.947,102.191) v1@113.814,101.324 ; 112.947,100.965 cw(c112.947,99.739) v1@113.814,100.606 ; 112.947,100.965 ccw(c112.947,102.191) v1@113.814,101.324 ; 112.947,100.965 cw(c112.947,99.739) v1@113.814,100.606 ; AVR.22@137.529,83.058 cw(c139.033,83.058) 137.97,84.122 ; AVR.22@137.529,83.058 cw(c139.033,83.058) 137.97,84.122 ; AVR.22@137.529,83.058 cw(c139.033,83.058) 137.97,84.122 ; AVR.22@137.529,83.058 cw(c139.033,83.058) 137.97,84.122 ; AVR.22@137.529,83.058 cw(c139.033,83.058) 137.97,84.122 ; AVR.22@137.529,83.058 cw(c139.033,83.058) 137.97,84.122 ; AVR.22@137.529,83.058 cw(c139.033,83.058) 137.97,84.122 ; AVR.22@137.544,83.669 ccw(c137.514,83.82) 137.668,83.82 ; AVR.22@137.544,83.669 ccw(c137.514,83.82) 137.668,83.82 ; AVR.22@137.544,83.669 ccw(c137.514,83.82) 137.668,83.82 ; AVR.22@137.544,83.669 ccw(c137.514,83.82) 137.668,83.82 ; AVR.22@137.544,83.669 ccw(c137.514,83.82) 137.668,83.82 ; AVR.22@137.544,83.669 ccw(c137.514,83.82) 137.668,83.82 ; AVR.22@137.544,83.669 ccw(c137.514,83.82) 137.668,83.82 ; 137.668,83.82 ccw(c137.822,83.82) AVR.22@137.792,83.669 ; 137.668,83.82 ccw(c137.822,83.82) AVR.22@137.792,83.669 ; 137.668,83.82 ccw(c137.822,83.82) AVR.22@137.792,83.669 ; 137.668,83.82 ccw(c137.822,83.82) AVR.22@137.792,83.669 ; 137.668,83.82 ccw(c137.822,83.82) AVR.22@137.792,83.669 ; 137.668,83.82 ccw(c137.822,83.82) AVR.22@137.792,83.669 ; 137.668,83.82 ccw(c137.822,83.82) AVR.22@137.792,83.669 ; AVR.22@137.783,83.058 cw(c139.9,83.058) 138.403,84.555 ; AVR.22@137.783,83.058 cw(c139.9,83.058) 138.403,84.555 ; AVR.22@137.783,83.058 cw(c139.9,83.058) 138.403,84.555 ; AVR.22@137.783,83.058 cw(c139.9,83.058) 138.403,84.555 ; AVR.22@137.783,83.058 cw(c139.9,83.058) 138.403,84.555 ; AVR.22@137.783,83.058 cw(c139.9,83.058) 138.403,84.555 ; AVR.22@137.783,83.058 cw(c139.9,83.058) 138.403,84.555 ; AVR.22@138.037,83.058 cw(c140.767,83.058) 138.837,84.989 ; AVR.22@138.037,83.058 cw(c140.767,83.058) 138.837,84.989 ; AVR.22@138.037,83.058 cw(c140.767,83.058) 138.837,84.989 ; AVR.22@138.037,83.058 cw(c140.767,83.058) 138.837,84.989 ; AVR.22@138.037,83.058 cw(c140.767,83.058) 138.837,84.989 ; AVR.22@138.037,83.058 cw(c140.767,83.058) 138.837,84.989 ; AVR.22@138.037,83.058 cw(c140.767,83.058) 138.837,84.989 ; AVR.22@138.291,83.058 cw(c141.635,83.058) 139.27,85.422 ; AVR.22@138.291,83.058 cw(c141.635,83.058) 139.27,85.422 ; AVR.22@138.291,83.058 cw(c141.635,83.058) 139.27,85.422 ; AVR.22@138.291,83.058 cw(c141.635,83.058) 139.27,85.422 ; AVR.22@138.291,83.058 cw(c141.635,83.058) 139.27,85.422 ; AVR.22@138.291,83.058 cw(c141.635,83.058) 139.27,85.422 ; AVR.22@138.291,83.058 cw(c141.635,83.058) 139.27,85.422 ; 140.668,86.82 cw(c141.732,85.757) PC7~PC0.1@141.732,87.261 ; 140.668,86.82 ccw(c139.605,87.884) PC7~PC0.1@141.109,87.884 ; 140.668,86.82 cw(c141.732,85.757) PC7~PC0.1@141.732,87.261 ; 140.668,86.82 ccw(c139.605,87.884) PC7~PC0.1@141.109,87.884 ; 140.668,86.82 ccw(c139.605,87.884) PC7~PC0.1@141.109,87.884 ; 140.668,86.82 cw(c141.732,85.757) PC7~PC0.1@141.732,87.261 ; 140.668,86.82 ccw(c139.605,87.884) PC7~PC0.1@141.109,87.884 ; 140.668,86.82 cw(c141.732,85.757) PC7~PC0.1@141.732,87.261 ; 140.668,86.82 ccw(c139.605,87.884) PC7~PC0.1@141.109,87.884 ; 140.668,86.82 cw(c141.732,85.757) PC7~PC0.1@141.732,87.261 ; 140.668,86.82 ccw(c139.605,87.884) PC7~PC0.1@141.109,87.884 ; 140.668,86.82 cw(c141.732,85.757) PC7~PC0.1@141.732,87.261 ; 140.668,86.82 ccw(c139.605,87.884) PC7~PC0.1@141.109,87.884 ; 140.668,86.82 cw(c141.732,85.757) PC7~PC0.1@141.732,87.261 ; PC7~PC0.1@141.102,87.254 cw(c141.732,86.624) PC7~PC0.1@141.732,87.515 ; PC7~PC0.1@141.102,87.254 ccw(c140.472,87.884) PC7~PC0.1@141.363,87.884 ; PC7~PC0.1@141.102,87.254 cw(c141.732,86.624) PC7~PC0.1@141.732,87.515 ; PC7~PC0.1@141.102,87.254 ccw(c140.472,87.884) PC7~PC0.1@141.363,87.884 ; PC7~PC0.1@141.102,87.254 ccw(c140.472,87.884) PC7~PC0.1@141.363,87.884 ; PC7~PC0.1@141.102,87.254 cw(c141.732,86.624) PC7~PC0.1@141.732,87.515 ; PC7~PC0.1@141.102,87.254 ccw(c140.472,87.884) PC7~PC0.1@141.363,87.884 ; PC7~PC0.1@141.102,87.254 cw(c141.732,86.624) PC7~PC0.1@141.732,87.515 ; PC7~PC0.1@141.102,87.254 ccw(c140.472,87.884) PC7~PC0.1@141.363,87.884 ; PC7~PC0.1@141.102,87.254 cw(c141.732,86.624) PC7~PC0.1@141.732,87.515 ; PC7~PC0.1@141.102,87.254 ccw(c140.472,87.884) PC7~PC0.1@141.363,87.884 ; PC7~PC0.1@141.102,87.254 cw(c141.732,86.624) PC7~PC0.1@141.732,87.515 ; PC7~PC0.1@141.102,87.254 ccw(c140.472,87.884) PC7~PC0.1@141.363,87.884 ; PC7~PC0.1@141.102,87.254 cw(c141.732,86.624) PC7~PC0.1@141.732,87.515
  Bottom Layer w0.254: v1(114.173,100.965) 143.002,100.965 145.415,98.552 145.415,89.662 143.637,87.884 PC7~PC0.1@141.732,87.884 ; v1@114.532,100.606 cw(c115.399,99.739) 115.399,100.965 ; v1@114.532,100.606 cw(c115.399,99.739) 115.399,100.965 ; v1@114.532,100.606 cw(c115.399,99.739) 115.399,100.965 ; v1@114.532,100.606 cw(c115.399,99.739) 115.399,100.965 ; v1@114.532,100.606 cw(c115.399,99.739) 115.399,100.965 ; v1@114.532,100.606 cw(c115.399,99.739) 115.399,100.965 ; v1@114.532,100.606 cw(c115.399,99.739) 115.399,100.965 ; v1@114.532,101.324 ccw(c115.399,102.191) 115.399,100.965 ; v1@114.532,101.324 ccw(c115.399,102.191) 115.399,100.965 ; v1@114.532,101.324 ccw(c115.399,102.191) 115.399,100.965 ; v1@114.532,101.324 ccw(c115.399,102.191) 115.399,100.965 ; v1@114.532,101.324 ccw(c115.399,102.191) 115.399,100.965 ; v1@114.532,101.324 ccw(c115.399,102.191) 115.399,100.965 ; v1@114.532,101.324 ccw(c115.399,102.191) 115.399,100.965 ; PC7~PC0.1@141.993,87.623 cw(c142.623,86.993) 142.623,87.884 ; PC7~PC0.1@141.993,87.623 cw(c142.623,86.993) 142.623,87.884 ; PC7~PC0.1@141.993,87.623 cw(c142.623,86.993) 142.623,87.884 ; PC7~PC0.1@141.993,87.623 cw(c142.623,86.993) 142.623,87.884 ; PC7~PC0.1@141.993,87.623 cw(c142.623,86.993) 142.623,87.884 ; PC7~PC0.1@141.993,87.623 cw(c142.623,86.993) 142.623,87.884 ; PC7~PC0.1@141.993,87.623 cw(c142.623,86.993) 142.623,87.884 ; PC7~PC0.1@141.993,88.145 ccw(c142.623,88.775) 142.623,87.884 ; PC7~PC0.1@141.993,88.145 ccw(c142.623,88.775) 142.623,87.884 ; PC7~PC0.1@141.993,88.145 ccw(c142.623,88.775) 142.623,87.884 ; PC7~PC0.1@141.993,88.145 ccw(c142.623,88.775) 142.623,87.884 ; PC7~PC0.1@141.993,88.145 ccw(c142.623,88.775) 142.623,87.884 ; PC7~PC0.1@141.993,88.145 ccw(c142.623,88.775) 142.623,87.884 ; PC7~PC0.1@141.993,88.145 ccw(c142.623,88.775) 142.623,87.884 ; PC7~PC0.1@142.173,87.443 cw(c143.236,86.38) 143.236,87.884 ; PC7~PC0.1@142.173,87.443 cw(c143.236,86.38) 143.236,87.884 ; PC7~PC0.1@142.173,87.443 cw(c143.236,86.38) 143.236,87.884 ; PC7~PC0.1@142.173,87.443 cw(c143.236,86.38) 143.236,87.884 ; PC7~PC0.1@142.173,87.443 cw(c143.236,86.38) 143.236,87.884 ; PC7~PC0.1@142.173,87.443 cw(c143.236,86.38) 143.236,87.884 ; PC7~PC0.1@142.173,87.443 cw(c143.236,86.38) 143.236,87.884 ; PC7~PC0.1@142.173,88.325 ccw(c143.236,89.388) 143.236,87.884 ; PC7~PC0.1@142.173,88.325 ccw(c143.236,89.388) 143.236,87.884 ; PC7~PC0.1@142.173,88.325 ccw(c143.236,89.388) 143.236,87.884 ; PC7~PC0.1@142.173,88.325 ccw(c143.236,89.388) 143.236,87.884 ; PC7~PC0.1@142.173,88.325 ccw(c143.236,89.388) 143.236,87.884 ; PC7~PC0.1@142.173,88.325 ccw(c143.236,89.388) 143.236,87.884 ; PC7~PC0.1@142.173,88.325 ccw(c143.236,89.388) 143.236,87.884